# EAGLE board esp32VeroBoard_Stickout (EAGLE 9.6.2)
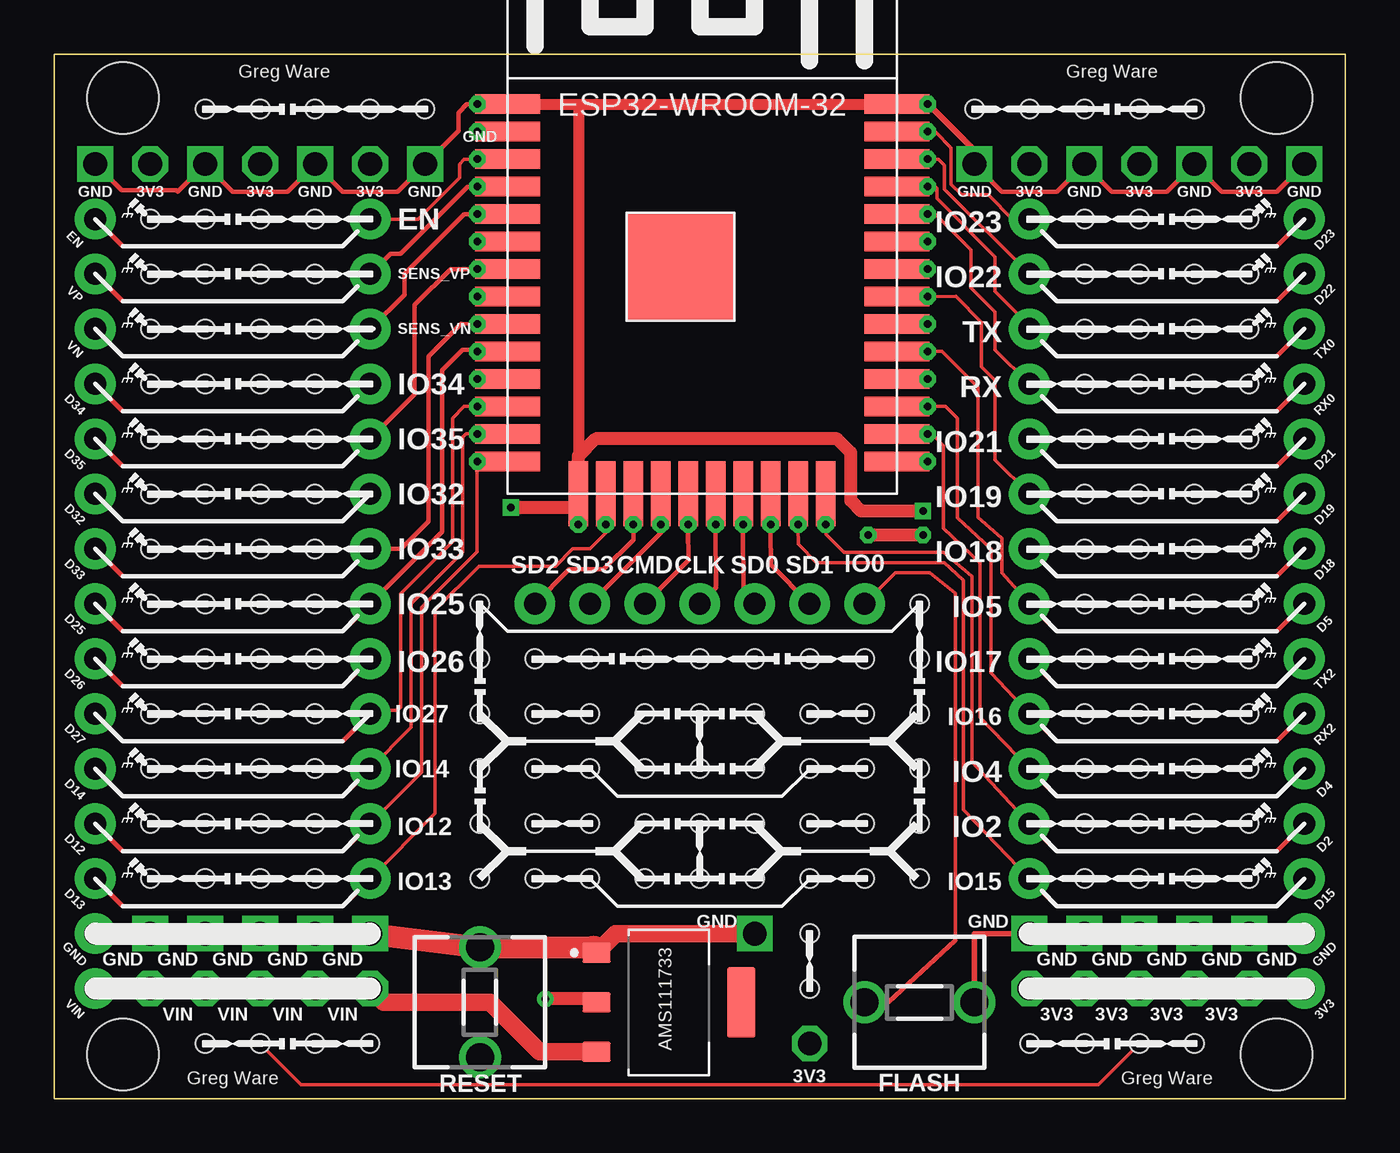
[diagram p0: board, top side]
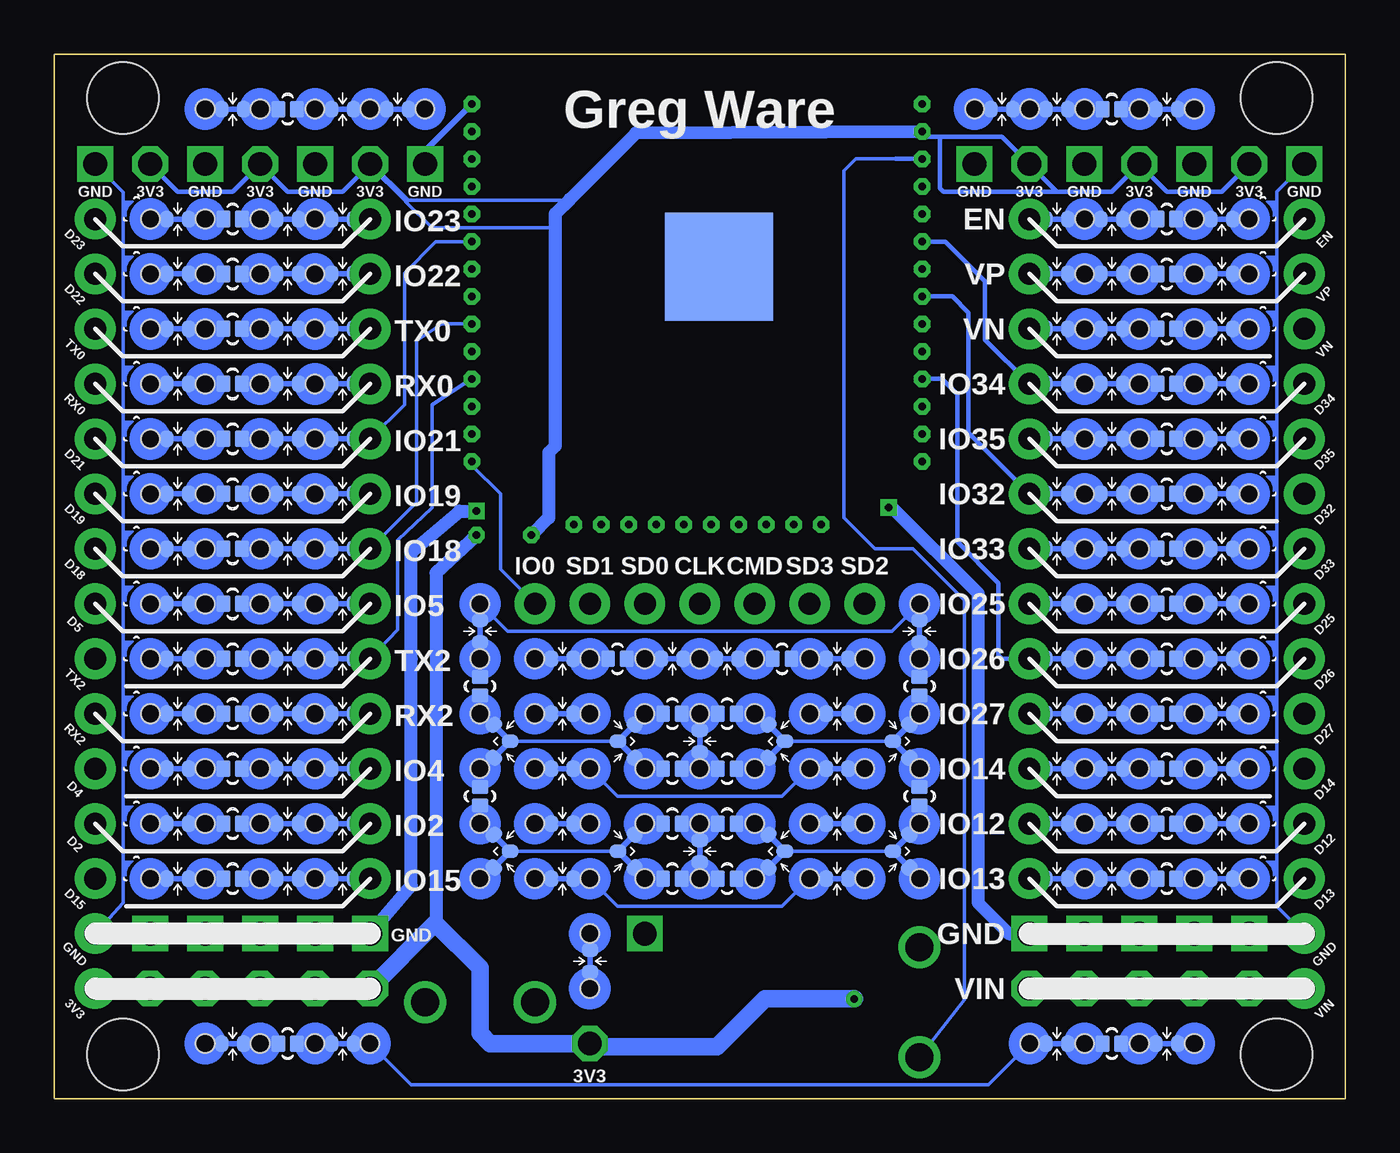
[diagram p1: board, bottom side, seen from below]

Size 59.69 x 48.26 mm. Coordinates in mm from the lower left corner, seen from the top.
Outline: 0,0 0,48.26 59.69,48.26 59.69,0 0,0
Copper layers (1*16): Top 0.035mm / dielectric 1.5mm / Bottom 0.035mm
Design rules "default": minimum track width 6mil, minimum drill 0.35mm, track to track 6mil, track to pad 6mil, pad to pad 6mil, via to via 6mil, smd to smd 6mil, copper to edge 40mil, drill to drill 6mil, minimum pad ring 10mil, minimum via ring 8mil, stop-mask expansion 4mil, vias tented up to drill 0mil, thermal gap 10mil
Net classes: 0 default: width 0.025 mm, clearance 0.025 mm
Holes 0.85 mm at 47.62,40.64 50.16,40.64 52.71,40.64 55.25,40.64 47.62,38.1 50.16,38.1 52.71,38.1 55.25,38.1 47.62,35.56 50.16,35.56 52.71,35.56 55.25,35.56 47.62,33.02 50.16,33.02 52.71,33.02 55.25,33.02 47.62,30.48 50.16,30.48 52.71,30.48 55.25,30.48 47.62,27.94 50.16,27.94 52.71,27.94 55.25,27.94 47.62,25.4 50.16,25.4 52.71,25.4 55.25,25.4 47.62,22.86 50.16,22.86 52.71,22.86 55.25,22.86 47.62,20.32 50.16,20.32 52.71,20.32 55.25,20.32 47.62,17.78 50.16,17.78 52.71,17.78 55.25,17.78 47.62,15.24 50.16,15.24 52.71,15.24 55.25,15.24 47.62,12.7 50.16,12.7 52.71,12.7 55.25,12.7 47.62,10.16 50.16,10.16 52.71,10.16 55.25,10.16 6.99,40.64 9.53,40.64 12.06,40.64 4.45,40.64 6.99,38.1 9.53,38.1 12.06,38.1 4.45,38.1 6.99,35.56 9.53,35.56 12.06,35.56 4.45,35.56 6.99,33.02 9.53,33.02 12.06,33.02 4.45,33.02 6.99,30.48 9.53,30.48 12.06,30.48 4.45,30.48 6.99,27.94 9.53,27.94 12.06,27.94 4.45,27.94 6.99,25.4 9.53,25.4 12.06,25.4 4.45,25.4 6.99,22.86 9.53,22.86 12.06,22.86 4.45,22.86 6.99,20.32 9.53,20.32 12.06,20.32 4.45,20.32 6.99,17.78 9.53,17.78 12.06,17.78 4.45,17.78 6.99,15.24 9.53,15.24 12.06,15.24 4.45,15.24 6.99,12.7 9.53,12.7 12.06,12.7 4.45,12.7 6.99,10.16 9.53,10.16 12.06,10.16 4.45,10.16 19.68,22.86 19.68,20.32 22.22,20.32 24.76,20.32 27.3,20.32 29.84,20.32 32.39,20.32 34.93,20.32 37.47,20.32 40.01,20.32 40.01,22.86 19.68,17.78 19.68,15.24 40.01,17.78 40.01,15.24 34.93,7.62 34.93,5.08 27.3,17.78 27.3,15.24 29.84,17.78 29.84,15.24 32.39,17.78 32.39,15.24 22.22,17.78 24.76,17.78 22.22,15.24 24.76,15.24 34.93,17.78 37.47,17.78 34.93,15.24 37.47,15.24 12.06,2.54 14.61,2.54 6.99,2.54 9.53,2.54 50.16,2.54 52.71,2.54 45.09,2.54 47.62,2.54 50.16,45.72 52.71,45.72 45.09,45.72 47.62,45.72 42.55,45.72 17.14,45.72 12.06,45.72 14.61,45.72 6.99,45.72 9.53,45.72 19.68,12.7 19.68,10.16 40.01,12.7 40.01,10.16 27.3,12.7 27.3,10.16 29.84,12.7 29.84,10.16 32.39,12.7 32.39,10.16 22.22,12.7 24.76,12.7 22.22,10.16 24.76,10.16 34.93,12.7 37.47,12.7 34.93,10.16 37.47,10.16

## Footprints (pad centres in the part's own frame; a part is rotated, then mirrored left to right if it is on the bottom)
SOT229P700X180-4N = smd 0.93 x 1.31: 1 -2.29,-3.345; 2 0,-3.345; 3 2.29,-3.345 | smd 3.24 x 1.31: 4 0,3.345
1X01_NO_SILK = drill 1.016 pad 1.88: 1 0,0
1X15_NO_SILK = drill 1.016 pad 1.88: 1 0,0; 2 2.54,0; 3 5.08,0; 4 7.62,0; 5 10.16,0; 6 12.7,0; 7 15.24,0; 8 17.78,0; 9 20.32,0; 10 22.86,0; 11 25.4,0; 12 27.94,0; 13 30.48,0; 14 33.02,0; 15 35.56,0
61300211121_VCC = drill 1.1 octagon: V+ 0,0
STAND-OFF = hole 3.302: 0,0
61300211121_GND = drill 1.1 square: GND 0,0
SMT-JUMPER_2_NO_NO-SILK_SMALL = smd 0.635 x 0.762: 1 -0.432,0; 2 0.432,0
SMT-JUMPER_TRI_NC_TRACE_NO-SILK_SMALL = smd 0.635 x 0.762 rotated 45 bottom: 1 -0.762,0 | smd 0.635 x 0.762 rotated 315 bottom: 2 0.762,0 | smd 0.635 x 0.762 bottom: 3 0,0.762
SMT-JUMPER_2_NC_TRACE_NO-SILK_SMALL = smd 0.635 x 0.762: 1 -0.508,0; 2 0.508,0
ESP32-WROOM = smd 3 x 0.9: 3V3 0,16.74; EN 0,15.47; GND1 0,18.01; GND3 18,18.01; IO0 18,1.5; IO4 18,2.77; IO5 18,6.58; IO12 0,1.5; IO14 0,2.77; IO16 18,4.04; IO17 18,5.31; IO18 18,7.85; IO19 18,9.12; IO21 18,11.66; IO22 18,15.47; IO23 18,16.74; IO25 0,6.58; IO26 0,5.31; IO27 0,4.04; IO32 0,9.12; IO33 0,7.85; IO34 0,11.66; IO35 0,10.39; NC 18,10.39; RX 18,12.93; SENSOR_VN 0,12.93; SENSOR_VP 0,14.2; TX 18,14.2 | smd 0.9 x 3: CLK 9.635,0; CMD 8.365,0; GND2 3.285,0; IO2 14.715,0; IO13 4.555,0; IO15 13.445,0; SD0 10.905,0; SD1 12.175,0; SD2 5.825,0; SD3 7.095,0 | smd 5 x 5: GND4 8,10.5 | smd 5 x 5 bottom: GND5 8,10.5
DTS-3_6MM = drill 1.3: 1 -2.54,0; 2 2.54,0

## Placement (x,y rotation side)
AMS111733  3.3V  [SOT229P700X180-4N]  28.42,4.45 270 top
CLK  [1X01_NO_SILK]  29.84,22.86 180 top
CMD  [1X01_NO_SILK]  27.3,22.86 180 top
E$1  [1X15_NO_SILK]  1.91,40.64 270 top
E$2  [61300211121_VCC]  34.93,2.54 0 top
E$3  [STAND-OFF]  3.17,2.03 0 top
E$4  [STAND-OFF]  56.52,2.03 0 top
E$5  [STAND-OFF]  56.52,46.23 0 top
E$6  [STAND-OFF]  3.17,46.23 0 top
E$7  [61300211121_GND]  32.39,7.62 0 top
E$8  [61300211121_GND]  42.55,43.18 0 top
E$9  [61300211121_GND]  1.91,43.18 0 top
E$10  [SMT-JUMPER_2_NO_NO-SILK_SMALL]  51.44,27.94 0 bottom
E$11  [SMT-JUMPER_2_NO_NO-SILK_SMALL]  51.44,30.48 0 bottom
E$12  [SMT-JUMPER_2_NO_NO-SILK_SMALL]  51.44,33.02 0 bottom
E$13  [SMT-JUMPER_2_NO_NO-SILK_SMALL]  51.44,35.56 0 bottom
E$14  [SMT-JUMPER_2_NO_NO-SILK_SMALL]  51.44,38.1 0 bottom
E$15  [SMT-JUMPER_2_NO_NO-SILK_SMALL]  51.44,40.64 0 bottom
E$16  [1X15_NO_SILK]  57.79,5.08 90 top
E$17  [SMT-JUMPER_2_NO_NO-SILK_SMALL]  51.44,25.4 0 bottom
E$18  [SMT-JUMPER_2_NO_NO-SILK_SMALL]  51.44,22.86 0 bottom
E$19  [SMT-JUMPER_2_NO_NO-SILK_SMALL]  51.44,20.32 0 bottom
E$20  [61300211121_GND]  57.79,43.18 0 top
E$21  [SMT-JUMPER_2_NO_NO-SILK_SMALL]  51.44,17.78 0 bottom
E$22  [61300211121_GND]  52.71,43.18 0 top
E$23  [61300211121_VCC]  55.25,43.18 0 top
E$24  [61300211121_GND]  4.45,7.62 0 top
E$25  [61300211121_GND]  6.99,7.62 0 top
E$26  [61300211121_GND]  9.53,7.62 0 top
E$27  [61300211121_GND]  12.06,7.62 0 top
E$28  [61300211121_GND]  14.61,7.62 0 top
E$29  [61300211121_GND]  55.25,7.62 0 top
E$30  [61300211121_GND]  52.71,7.62 0 top
E$31  [61300211121_GND]  50.16,7.62 0 top
E$32  [61300211121_GND]  47.62,7.62 0 top
E$33  [61300211121_GND]  45.09,7.62 0 top
E$34  [61300211121_VCC]  9.53,5.08 0 top
E$35  [61300211121_VCC]  12.06,5.08 0 top
E$36  [61300211121_VCC]  14.61,5.08 0 top
E$37  [61300211121_VCC]  6.99,5.08 0 top
E$38  [61300211121_VCC]  4.45,5.08 0 top
E$39  [61300211121_VCC]  45.09,5.08 0 top
E$40  [61300211121_VCC]  47.62,5.08 0 top
E$41  [61300211121_VCC]  50.16,5.08 0 top
E$42  [61300211121_VCC]  52.71,5.08 0 top
E$43  [61300211121_VCC]  55.25,5.08 0 top
E$44  [61300211121_VCC]  9.53,43.18 0 top
E$45  [61300211121_VCC]  4.45,43.18 0 top
E$46  [61300211121_VCC]  14.61,43.18 0 top
E$47  [SMT-JUMPER_2_NO_NO-SILK_SMALL]  51.44,15.24 0 bottom
E$48  [SMT-JUMPER_2_NO_NO-SILK_SMALL]  51.44,12.7 0 bottom
E$49  [61300211121_GND]  6.99,43.18 0 top
E$50  [61300211121_GND]  12.06,43.18 0 top
E$51  [61300211121_GND]  17.14,43.18 0 top
E$52  [SMT-JUMPER_2_NO_NO-SILK_SMALL]  51.44,10.16 0 bottom
E$53  [61300211121_GND]  47.62,43.18 0 top
E$54  [61300211121_VCC]  50.16,43.18 0 top
E$55  [SMT-JUMPER_2_NO_NO-SILK_SMALL]  33.66,20.32 0 bottom
E$56  [61300211121_VCC]  45.09,43.18 0 top
E$57  [SMT-JUMPER_TRI_NC_TRACE_NO-SILK_SMALL]  39.37,16.51 90 top
E$58  [SMT-JUMPER_2_NO_NO-SILK_SMALL]  8.26,40.64 0 bottom
E$59  [SMT-JUMPER_2_NO_NO-SILK_SMALL]  8.26,38.1 0 bottom
E$60  [SMT-JUMPER_2_NO_NO-SILK_SMALL]  8.26,35.56 0 bottom
E$61  [SMT-JUMPER_2_NO_NO-SILK_SMALL]  8.26,33.02 0 bottom
E$62  [SMT-JUMPER_2_NO_NO-SILK_SMALL]  8.26,30.48 0 bottom
E$63  [SMT-JUMPER_2_NO_NO-SILK_SMALL]  8.26,27.94 0 bottom
E$64  [SMT-JUMPER_2_NO_NO-SILK_SMALL]  8.26,25.4 0 bottom
E$65  [SMT-JUMPER_2_NO_NO-SILK_SMALL]  8.26,22.86 0 bottom
E$66  [SMT-JUMPER_2_NO_NO-SILK_SMALL]  8.26,20.32 0 bottom
E$67  [SMT-JUMPER_2_NO_NO-SILK_SMALL]  8.26,17.78 0 bottom
E$68  [SMT-JUMPER_2_NO_NO-SILK_SMALL]  8.26,15.24 0 bottom
E$69  [SMT-JUMPER_2_NO_NO-SILK_SMALL]  8.26,12.7 0 bottom
E$70  [SMT-JUMPER_2_NO_NO-SILK_SMALL]  8.26,10.16 0 bottom
E$71  [SMT-JUMPER_2_NC_TRACE_NO-SILK_SMALL]  53.98,40.64 0 bottom
E$72  [SMT-JUMPER_2_NC_TRACE_NO-SILK_SMALL]  53.98,38.1 0 bottom
E$73  [SMT-JUMPER_2_NC_TRACE_NO-SILK_SMALL]  53.98,35.56 0 bottom
E$74  [SMT-JUMPER_2_NC_TRACE_NO-SILK_SMALL]  53.98,33.02 0 bottom
E$75  [SMT-JUMPER_2_NC_TRACE_NO-SILK_SMALL]  53.98,30.48 0 bottom
E$76  [SMT-JUMPER_2_NC_TRACE_NO-SILK_SMALL]  53.98,27.94 0 bottom
E$77  [SMT-JUMPER_2_NC_TRACE_NO-SILK_SMALL]  53.98,25.4 0 bottom
E$78  [SMT-JUMPER_2_NC_TRACE_NO-SILK_SMALL]  53.98,22.86 0 bottom
E$79  [SMT-JUMPER_2_NC_TRACE_NO-SILK_SMALL]  53.98,20.32 0 bottom
E$80  [SMT-JUMPER_2_NC_TRACE_NO-SILK_SMALL]  53.98,17.78 0 bottom
E$81  [SMT-JUMPER_2_NC_TRACE_NO-SILK_SMALL]  53.98,15.24 0 bottom
E$82  [SMT-JUMPER_2_NC_TRACE_NO-SILK_SMALL]  53.98,12.7 0 bottom
E$83  [SMT-JUMPER_2_NC_TRACE_NO-SILK_SMALL]  53.98,10.16 0 bottom
E$84  [SMT-JUMPER_2_NC_TRACE_NO-SILK_SMALL]  36.2,20.32 0 bottom
E$85  [SMT-JUMPER_2_NC_TRACE_NO-SILK_SMALL]  36.2,17.78 0 bottom
E$86  [SMT-JUMPER_2_NC_TRACE_NO-SILK_SMALL]  36.2,15.24 0 bottom
E$87  [SMT-JUMPER_2_NC_TRACE_NO-SILK_SMALL]  36.2,12.7 0 bottom
E$88  [SMT-JUMPER_2_NC_TRACE_NO-SILK_SMALL]  36.2,10.16 0 bottom
E$89  [SMT-JUMPER_2_NC_TRACE_NO-SILK_SMALL]  31.11,20.32 0 bottom
E$90  [SMT-JUMPER_2_NC_TRACE_NO-SILK_SMALL]  28.57,20.32 0 bottom
E$91  [SMT-JUMPER_2_NC_TRACE_NO-SILK_SMALL]  23.49,20.32 0 bottom
E$92  [SMT-JUMPER_2_NC_TRACE_NO-SILK_SMALL]  23.49,17.78 0 bottom
E$93  [SMT-JUMPER_2_NC_TRACE_NO-SILK_SMALL]  23.49,15.24 0 bottom
E$94  [SMT-JUMPER_2_NC_TRACE_NO-SILK_SMALL]  23.49,12.7 0 bottom
E$95  [SMT-JUMPER_2_NC_TRACE_NO-SILK_SMALL]  23.49,10.16 0 bottom
E$96  [SMT-JUMPER_2_NC_TRACE_NO-SILK_SMALL]  51.44,2.54 0 bottom
E$97  [SMT-JUMPER_2_NC_TRACE_NO-SILK_SMALL]  46.36,2.54 0 bottom
E$98  [SMT-JUMPER_2_NC_TRACE_NO-SILK_SMALL]  13.34,2.54 0 bottom
E$99  [SMT-JUMPER_2_NC_TRACE_NO-SILK_SMALL]  8.26,2.54 0 bottom
E$100  [SMT-JUMPER_2_NC_TRACE_NO-SILK_SMALL]  5.71,10.16 0 bottom
E$101  [SMT-JUMPER_2_NC_TRACE_NO-SILK_SMALL]  5.71,12.7 0 bottom
E$102  [SMT-JUMPER_2_NC_TRACE_NO-SILK_SMALL]  5.71,15.24 0 bottom
E$103  [SMT-JUMPER_2_NC_TRACE_NO-SILK_SMALL]  5.71,17.78 0 bottom
E$104  [SMT-JUMPER_2_NC_TRACE_NO-SILK_SMALL]  5.71,20.32 0 bottom
E$105  [SMT-JUMPER_2_NC_TRACE_NO-SILK_SMALL]  5.71,22.86 0 bottom
E$106  [SMT-JUMPER_2_NC_TRACE_NO-SILK_SMALL]  5.71,25.4 0 bottom
E$107  [SMT-JUMPER_2_NC_TRACE_NO-SILK_SMALL]  5.71,27.94 0 bottom
E$108  [SMT-JUMPER_2_NC_TRACE_NO-SILK_SMALL]  5.71,30.48 0 bottom
E$109  [SMT-JUMPER_2_NC_TRACE_NO-SILK_SMALL]  5.71,33.02 0 bottom
E$110  [SMT-JUMPER_2_NC_TRACE_NO-SILK_SMALL]  5.71,35.56 0 bottom
E$111  [SMT-JUMPER_2_NC_TRACE_NO-SILK_SMALL]  5.71,38.1 0 bottom
E$112  [SMT-JUMPER_2_NC_TRACE_NO-SILK_SMALL]  5.71,40.64 0 bottom
E$113  [SMT-JUMPER_2_NC_TRACE_NO-SILK_SMALL]  8.26,45.72 0 bottom
E$114  [SMT-JUMPER_2_NC_TRACE_NO-SILK_SMALL]  13.34,45.72 0 bottom
E$115  [SMT-JUMPER_2_NC_TRACE_NO-SILK_SMALL]  15.88,45.72 0 bottom
E$116  [SMT-JUMPER_2_NC_TRACE_NO-SILK_SMALL]  43.82,45.72 0 bottom
E$117  [SMT-JUMPER_2_NC_TRACE_NO-SILK_SMALL]  46.36,45.72 0 bottom
E$118  [SMT-JUMPER_2_NC_TRACE_NO-SILK_SMALL]  51.44,45.72 0 bottom
E$119  [SMT-JUMPER_2_NO_NO-SILK_SMALL]  48.9,45.72 0 bottom
E$120  [SMT-JUMPER_2_NO_NO-SILK_SMALL]  10.79,45.72 0 bottom
E$121  [SMT-JUMPER_2_NO_NO-SILK_SMALL]  48.9,2.54 0 bottom
E$122  [SMT-JUMPER_2_NO_NO-SILK_SMALL]  10.79,2.54 0 bottom
E$123  [SMT-JUMPER_2_NC_TRACE_NO-SILK_SMALL]  40.01,21.59 90 bottom
E$124  [SMT-JUMPER_TRI_NC_TRACE_NO-SILK_SMALL]  39.37,11.43 90 top
E$125  [SMT-JUMPER_TRI_NC_TRACE_NO-SILK_SMALL]  26.67,16.51 90 top
E$126  [SMT-JUMPER_TRI_NC_TRACE_NO-SILK_SMALL]  26.67,11.43 90 top
E$127  [SMT-JUMPER_TRI_NC_TRACE_NO-SILK_SMALL]  20.16,11.43 270 top
E$128  [SMT-JUMPER_2_NC_TRACE_NO-SILK_SMALL]  29.84,16.51 90 bottom
E$129  [SMT-JUMPER_2_NC_TRACE_NO-SILK_SMALL]  29.84,11.43 90 bottom
E$130  [SMT-JUMPER_TRI_NC_TRACE_NO-SILK_SMALL]  20.16,16.51 270 top
E$131  [SMT-JUMPER_TRI_NC_TRACE_NO-SILK_SMALL]  32.86,16.51 270 top
E$132  [SMT-JUMPER_2_NC_TRACE_NO-SILK_SMALL]  19.68,21.59 90 bottom
E$133  [SMT-JUMPER_TRI_NC_TRACE_NO-SILK_SMALL]  32.86,11.43 270 top
E$134  [SMT-JUMPER_2_NO_NO-SILK_SMALL]  26.04,20.32 0 bottom
E$135  [SMT-JUMPER_2_NO_NO-SILK_SMALL]  19.68,19.05 270 bottom
E$136  [SMT-JUMPER_2_NO_NO-SILK_SMALL]  19.68,13.97 270 bottom
E$137  [SMT-JUMPER_2_NO_NO-SILK_SMALL]  40.01,19.05 270 bottom
E$138  [SMT-JUMPER_2_NO_NO-SILK_SMALL]  40.01,13.97 270 bottom
E$139  [SMT-JUMPER_2_NO_NO-SILK_SMALL]  31.11,17.78 0 bottom
E$140  [SMT-JUMPER_2_NO_NO-SILK_SMALL]  28.57,17.78 0 bottom
E$141  [SMT-JUMPER_2_NC_TRACE_NO-SILK_SMALL]  48.9,10.16 0 bottom
E$142  [SMT-JUMPER_2_NC_TRACE_NO-SILK_SMALL]  48.9,12.7 0 bottom
E$143  [SMT-JUMPER_2_NC_TRACE_NO-SILK_SMALL]  48.9,15.24 0 bottom
E$144  [SMT-JUMPER_2_NC_TRACE_NO-SILK_SMALL]  48.9,17.78 0 bottom
E$145  [SMT-JUMPER_2_NC_TRACE_NO-SILK_SMALL]  48.9,20.32 0 bottom
E$146  [SMT-JUMPER_2_NC_TRACE_NO-SILK_SMALL]  48.9,22.86 0 bottom
E$147  [SMT-JUMPER_2_NC_TRACE_NO-SILK_SMALL]  48.9,25.4 0 bottom
E$148  [SMT-JUMPER_2_NC_TRACE_NO-SILK_SMALL]  48.9,27.94 0 bottom
E$149  [SMT-JUMPER_2_NC_TRACE_NO-SILK_SMALL]  48.9,30.48 0 bottom
E$150  [SMT-JUMPER_2_NC_TRACE_NO-SILK_SMALL]  48.9,33.02 0 bottom
E$151  [SMT-JUMPER_2_NC_TRACE_NO-SILK_SMALL]  48.9,35.56 0 bottom
E$152  [SMT-JUMPER_2_NC_TRACE_NO-SILK_SMALL]  48.9,38.1 0 bottom
E$153  [SMT-JUMPER_2_NC_TRACE_NO-SILK_SMALL]  48.9,40.64 0 bottom
E$154  [SMT-JUMPER_2_NC_TRACE_NO-SILK_SMALL]  10.79,10.16 0 bottom
E$155  [SMT-JUMPER_2_NC_TRACE_NO-SILK_SMALL]  10.79,12.7 0 bottom
E$156  [SMT-JUMPER_2_NC_TRACE_NO-SILK_SMALL]  10.79,15.24 0 bottom
E$157  [SMT-JUMPER_2_NC_TRACE_NO-SILK_SMALL]  10.79,17.78 0 bottom
E$158  [SMT-JUMPER_2_NC_TRACE_NO-SILK_SMALL]  10.79,20.32 0 bottom
E$159  [SMT-JUMPER_2_NC_TRACE_NO-SILK_SMALL]  10.79,22.86 0 bottom
E$160  [SMT-JUMPER_2_NC_TRACE_NO-SILK_SMALL]  10.79,25.4 0 bottom
E$161  [SMT-JUMPER_2_NC_TRACE_NO-SILK_SMALL]  10.79,27.94 0 bottom
E$162  [SMT-JUMPER_2_NC_TRACE_NO-SILK_SMALL]  10.79,30.48 0 bottom
E$163  [SMT-JUMPER_2_NC_TRACE_NO-SILK_SMALL]  10.79,33.02 0 bottom
E$164  [SMT-JUMPER_2_NC_TRACE_NO-SILK_SMALL]  10.79,35.56 0 bottom
E$165  [SMT-JUMPER_2_NC_TRACE_NO-SILK_SMALL]  10.79,38.1 0 bottom
E$166  [SMT-JUMPER_2_NC_TRACE_NO-SILK_SMALL]  10.79,40.64 0 bottom
E$167  [SMT-JUMPER_2_NO_NO-SILK_SMALL]  31.11,15.24 0 bottom
E$168  [SMT-JUMPER_2_NO_NO-SILK_SMALL]  28.57,15.24 0 bottom
E$169  [SMT-JUMPER_2_NO_NO-SILK_SMALL]  28.57,12.7 0 bottom
E$170  [SMT-JUMPER_2_NO_NO-SILK_SMALL]  31.11,12.7 0 bottom
E$171  [SMT-JUMPER_2_NO_NO-SILK_SMALL]  31.11,10.16 0 bottom
E$172  [SMT-JUMPER_2_NO_NO-SILK_SMALL]  28.57,10.16 0 bottom
E$173  [SMT-JUMPER_2_NC_TRACE_NO-SILK_SMALL]  46.36,22.86 0 bottom
E$174  [SMT-JUMPER_2_NC_TRACE_NO-SILK_SMALL]  46.36,25.4 0 bottom
E$175  [SMT-JUMPER_2_NC_TRACE_NO-SILK_SMALL]  46.36,27.94 0 bottom
E$176  [SMT-JUMPER_2_NC_TRACE_NO-SILK_SMALL]  46.36,30.48 0 bottom
E$177  [SMT-JUMPER_2_NC_TRACE_NO-SILK_SMALL]  46.36,33.02 0 bottom
E$178  [SMT-JUMPER_2_NC_TRACE_NO-SILK_SMALL]  46.36,35.56 0 bottom
E$179  [SMT-JUMPER_2_NC_TRACE_NO-SILK_SMALL]  46.36,38.1 0 bottom
E$180  [SMT-JUMPER_2_NC_TRACE_NO-SILK_SMALL]  46.36,40.64 0 bottom
E$181  [SMT-JUMPER_2_NC_TRACE_NO-SILK_SMALL]  46.36,10.16 0 bottom
E$182  [SMT-JUMPER_2_NC_TRACE_NO-SILK_SMALL]  46.36,12.7 0 bottom
E$183  [SMT-JUMPER_2_NC_TRACE_NO-SILK_SMALL]  46.36,15.24 0 bottom
E$184  [SMT-JUMPER_2_NC_TRACE_NO-SILK_SMALL]  46.36,17.78 0 bottom
E$185  [SMT-JUMPER_2_NC_TRACE_NO-SILK_SMALL]  46.36,20.32 0 bottom
E$186  [SMT-JUMPER_2_NC_TRACE_NO-SILK_SMALL]  13.34,10.16 0 bottom
E$187  [SMT-JUMPER_2_NC_TRACE_NO-SILK_SMALL]  13.34,12.7 0 bottom
E$188  [SMT-JUMPER_2_NC_TRACE_NO-SILK_SMALL]  13.34,15.24 0 bottom
E$189  [SMT-JUMPER_2_NC_TRACE_NO-SILK_SMALL]  13.34,17.78 0 bottom
E$190  [SMT-JUMPER_2_NC_TRACE_NO-SILK_SMALL]  13.34,20.32 0 bottom
E$191  [SMT-JUMPER_2_NC_TRACE_NO-SILK_SMALL]  13.34,22.86 0 bottom
E$192  [SMT-JUMPER_2_NC_TRACE_NO-SILK_SMALL]  13.34,25.4 0 bottom
E$193  [SMT-JUMPER_2_NC_TRACE_NO-SILK_SMALL]  13.34,27.94 0 bottom
E$194  [SMT-JUMPER_2_NC_TRACE_NO-SILK_SMALL]  13.34,30.48 0 bottom
E$195  [SMT-JUMPER_2_NC_TRACE_NO-SILK_SMALL]  13.34,33.02 0 bottom
E$196  [SMT-JUMPER_2_NC_TRACE_NO-SILK_SMALL]  13.34,35.56 0 bottom
E$197  [SMT-JUMPER_2_NC_TRACE_NO-SILK_SMALL]  13.34,38.1 0 bottom
E$198  [SMT-JUMPER_2_NC_TRACE_NO-SILK_SMALL]  13.34,40.64 0 bottom
E$199  [SMT-JUMPER_2_NC_TRACE_NO-SILK_SMALL]  34.93,6.35 90 bottom
E$200  [SMT-JUMPER_1_NC_CIRCLE_GND_NO-SILK_SMALL]  4.45,40.64 0 top
E$201  [SMT-JUMPER_1_NC_CIRCLE_GND_NO-SILK_SMALL]  4.45,38.1 0 top
E$202  [SMT-JUMPER_1_NC_CIRCLE_GND_NO-SILK_SMALL]  4.45,35.56 0 top
E$203  [SMT-JUMPER_1_NC_CIRCLE_GND_NO-SILK_SMALL]  4.45,33.02 0 top
E$204  [SMT-JUMPER_1_NC_CIRCLE_GND_NO-SILK_SMALL]  4.45,30.48 0 top
E$205  [SMT-JUMPER_1_NC_CIRCLE_GND_NO-SILK_SMALL]  4.45,27.94 0 top
E$206  [SMT-JUMPER_1_NC_CIRCLE_GND_NO-SILK_SMALL]  4.45,25.4 0 top
E$207  [SMT-JUMPER_1_NC_CIRCLE_GND_NO-SILK_SMALL]  4.45,22.86 0 top
E$208  [SMT-JUMPER_1_NC_CIRCLE_GND_NO-SILK_SMALL]  4.45,20.32 0 top
E$209  [SMT-JUMPER_1_NC_CIRCLE_GND_NO-SILK_SMALL]  4.45,17.78 0 top
E$210  [SMT-JUMPER_1_NC_CIRCLE_GND_NO-SILK_SMALL]  4.45,15.24 0 top
E$211  [SMT-JUMPER_1_NC_CIRCLE_GND_NO-SILK_SMALL]  4.45,12.7 0 top
E$212  [SMT-JUMPER_1_NC_CIRCLE_GND_NO-SILK_SMALL]  4.45,10.16 0 top
E$213  [SMT-JUMPER_1_NC_CIRCLE_GND_NO-SILK_SMALL_RIGT]  55.25,40.64 0 top
E$214  [SMT-JUMPER_1_NC_CIRCLE_GND_NO-SILK_SMALL_RIGT]  55.25,38.1 0 top
E$215  [SMT-JUMPER_1_NC_CIRCLE_GND_NO-SILK_SMALL_RIGT]  55.25,35.56 0 top
E$216  [SMT-JUMPER_1_NC_CIRCLE_GND_NO-SILK_SMALL_RIGT]  55.25,33.02 0 top
E$217  [SMT-JUMPER_1_NC_CIRCLE_GND_NO-SILK_SMALL_RIGT]  55.25,30.48 0 top
E$218  [SMT-JUMPER_1_NC_CIRCLE_GND_NO-SILK_SMALL_RIGT]  55.25,27.94 0 top
E$219  [SMT-JUMPER_1_NC_CIRCLE_GND_NO-SILK_SMALL_RIGT]  55.25,25.4 0 top
E$220  [SMT-JUMPER_1_NC_CIRCLE_GND_NO-SILK_SMALL_RIGT]  55.25,22.86 0 top
E$221  [SMT-JUMPER_1_NC_CIRCLE_GND_NO-SILK_SMALL_RIGT]  55.25,20.32 0 top
E$222  [SMT-JUMPER_1_NC_CIRCLE_GND_NO-SILK_SMALL_RIGT]  55.25,17.78 0 top
E$223  [SMT-JUMPER_1_NC_CIRCLE_GND_NO-SILK_SMALL_RIGT]  55.25,15.24 0 top
E$224  [SMT-JUMPER_1_NC_CIRCLE_GND_NO-SILK_SMALL_RIGT]  55.25,12.7 0 top
E$225  [SMT-JUMPER_1_NC_CIRCLE_GND_NO-SILK_SMALL_RIGT]  55.25,10.16 0 top
EN  [1X01_NO_SILK]  14.61,40.64 0 top
ESPWROOM  [ESP32-WROOM]  20.95,27.94 0 top
FLASH  [DTS-3_6MM]  40.01,4.45 180 top
IO0  [1X01_NO_SILK]  37.47,22.86 0 top
IO2  [1X01_NO_SILK]  45.09,12.7 0 top
IO4  [1X01_NO_SILK]  45.09,15.24 0 top
IO5  [1X01_NO_SILK]  45.09,22.86 0 top
IO12  [1X01_NO_SILK]  14.61,12.7 0 top
IO13  [1X01_NO_SILK]  14.61,10.16 0 top
IO14  [1X01_NO_SILK]  14.61,15.24 0 top
IO15  [1X01_NO_SILK]  45.09,10.16 0 top
IO16  [1X01_NO_SILK]  45.09,17.78 0 top
IO17  [1X01_NO_SILK]  45.09,20.32 0 top
IO18  [1X01_NO_SILK]  45.09,25.4 0 top
IO19  [1X01_NO_SILK]  45.09,27.94 0 top
IO21  [1X01_NO_SILK]  45.09,30.48 0 top
IO22  [1X01_NO_SILK]  45.09,38.1 0 top
IO23  [1X01_NO_SILK]  45.09,40.64 0 top
IO25  [1X01_NO_SILK]  14.61,22.86 0 top
IO26  [1X01_NO_SILK]  14.61,20.32 0 top
IO27  [1X01_NO_SILK]  14.61,17.78 0 top
IO32  [1X01_NO_SILK]  14.61,27.94 0 top
IO33  [1X01_NO_SILK]  14.61,25.4 0 top
IO34  [1X01_NO_SILK]  14.61,33.02 0 top
IO35  [1X01_NO_SILK]  14.61,30.48 0 top
RESET  [DTS-3_6MM]  19.68,4.45 90 top
RX  [1X01_NO_SILK]  45.09,33.02 0 top
SD0  [1X01_NO_SILK]  32.39,22.86 180 top
SD1  [1X01_NO_SILK]  34.93,22.86 180 top
SD2  [1X01_NO_SILK]  22.22,22.86 180 top
SD3  [1X01_NO_SILK]  24.76,22.86 180 top
SENS_VN  [1X01_NO_SILK]  14.61,35.56 0 top
SENS_VP  [1X01_NO_SILK]  14.61,38.1 0 top
TX  [1X01_NO_SILK]  45.09,35.56 0 top

## Library data of the parts
AMS111733 = AMS1117-5.0
CLK CMD EN IO0 IO2 IO4 IO5 IO12-IO19 IO21-IO23 IO25-IO27 IO32-IO35 RX SD0 SD1-SD3 SENS_VN SENS_VP TX = SparkFun-Connectors
E$1 E$16 = SparkFun-Connectors_PhG
E$2 E$7-E$9 E$20 E$22-E$46 E$49-E$51 E$53 E$54 E$56 = Headers_PhG
E$3-E$6 = SparkFun-Hardware
E$10-E$15 E$17-E$19 E$21 E$47 E$48 E$52 E$55 E$57-E$225 = SparkFun-Jumpers_PhG
ESPWROOM = ESP32
FLASH RESET = switch-tact

## Nets
3V3: AMS111733.2 E$2.V+ E$16.1 E$23.V+ E$39.V+ E$40.V+ E$41.V+ E$42.V+ E$43.V+ E$44.V+ E$45.V+ E$46.V+ E$54.V+ E$56.V+ ESPWROOM.3V3
CLK: CLK.1 ESPWROOM.CLK
CMD: CMD.1 ESPWROOM.CMD
EN: E$1.1 EN.1 ESPWROOM.EN RESET.1
GND: AMS111733.1 E$1.14 E$7.GND E$8.GND E$9.GND E$16.2 E$20.GND E$22.GND E$24.GND E$25.GND E$26.GND E$27.GND E$28.GND E$29.GND E$30.GND E$31.GND E$32.GND E$33.GND E$49.GND E$50.GND E$51.GND E$53.GND ESPWROOM.GND1 ESPWROOM.GND2 ESPWROOM.GND3 FLASH.1 RESET.2
IO0: ESPWROOM.IO0 FLASH.2 IO0.1
IO2: E$16.4 ESPWROOM.IO2 IO2.1
IO4: E$16.5 ESPWROOM.IO4 IO4.1
IO5: E$16.8 ESPWROOM.IO5 IO5.1
IO12: E$1.12 ESPWROOM.IO12 IO12.1
IO13: E$1.13 ESPWROOM.IO13 IO13.1
IO14: E$1.11 ESPWROOM.IO14 IO14.1
IO15: E$16.3 ESPWROOM.IO15 IO15.1
IO16: E$16.6 ESPWROOM.IO16 IO16.1
IO17: E$16.7 ESPWROOM.IO17 IO17.1
IO18: E$16.9 ESPWROOM.IO18 IO18.1
IO19: E$16.10 ESPWROOM.IO19 IO19.1
IO21: E$16.11 ESPWROOM.IO21 IO21.1
IO22: E$16.14 ESPWROOM.IO22 IO22.1
IO23: E$16.15 ESPWROOM.IO23 IO23.1
IO25: E$1.8 ESPWROOM.IO25 IO25.1
IO26: E$1.9 ESPWROOM.IO26 IO26.1
IO27: E$1.10 ESPWROOM.IO27 IO27.1
IO32: E$1.6 ESPWROOM.IO32 IO32.1
IO33: E$1.7 ESPWROOM.IO33 IO33.1
IO34: E$1.4 ESPWROOM.IO34 IO34.1
IO35: E$1.5 ESPWROOM.IO35 IO35.1
RX: E$16.12 ESPWROOM.RX RX.1
SD0: ESPWROOM.SD0 SD0.1
SD1: ESPWROOM.SD1 SD1.1
SD2: ESPWROOM.SD2 SD2.1
SD3: ESPWROOM.SD3 SD3.1
SENSOR_VN: E$1.3 ESPWROOM.SENSOR_VN SENS_VN.1
SENSOR_VP: E$1.2 ESPWROOM.SENSOR_VP SENS_VP.1
TX: E$16.13 ESPWROOM.TX TX.1
VIN: AMS111733.3 E$1.15 E$34.V+ E$35.V+ E$36.V+ E$37.V+ E$38.V+

## Tracks (layer width: path | path; a pad name or v marks a point on that pad's centre or on a via)
3V3  (via drill 0.35)
  Top 0.152: ESPWROOM.3V3 19.76,44.68 v19.56,44.68
  Top 0.61: v40.16,26.04 v37.62,26.04 | AMS111733.2 25.23,4.6 v22.7,4.6
  Top 0.813: E$16.1 E$43.V+ E$42.V+ E$41.V+ E$40.V+ E$39.V+
  Bottom 0.152: 36.51,40.23 42.23,40.23 43.44,41.44 43.44,41.5 43.4,41.5 35.88,41.5 35.85,41.56
  Bottom 0.203: 13.34,41.91 E$46.V+ 15.88,44.45 18.73,44.45 | 13.34,41.91 10.79,41.91 E$44.V+ 8.26,41.91 5.71,41.91 E$45.V+ | E$23.V+ 53.98,41.91 51.44,41.91 E$54.V+ 48.9,41.91 46.36,41.91 E$56.V+ | v19.56,44.68 19.53,44.45 18.73,44.45 | 13.34,41.91 18.57,41.91 18.73,42.07 18.73,44.45 | 42.04,8.13 42.07,8.1
  Bottom 0.305: 43.4,41.5 E$56.V+
  Bottom 0.61: v37.62,26.04 36.83,26.83 36.83,29.84 36.51,30.16 36.51,40.23 36.51,40.9 35.85,41.56 32.8,44.61 v19.56,44.68 | v40.16,26.04 42.04,24.29 42.04,8.13
  Bottom 0.813: v22.7,4.6 26.83,4.6 29.05,2.38 34.77,2.38 E$2.V+ 39.53,2.54 40.01,3.02 40.01,6.03 42.07,8.1 E$39.V+
CLK  (via drill 0.35)
  Top 0.152: ESPWROOM.CLK v30.59,26.52 v30.58,26.51
  Top 0.203: CLK.1 30.59,23.61 v30.58,26.51 v30.58,26.52
CMD  (via drill 0.35)
  Top 0.152: ESPWROOM.CMD 29.32,26.36 29.31,26.35
  Top 0.203: CMD.1 29.32,24.88 29.31,26.35 v29.31,26.52
EN  (via drill 0.35)
  Top 0.152: 14.68,40.71 EN.1 16.83,40.64 18.73,42.55 18.73,43.18 18.96,43.41 19.61,43.41 | ESPWROOM.EN 19.61,43.41 | v19.56,43.41 19.61,43.41
  Top 0.203: EN.1 13.34,39.37 3.17,39.37 E$1.1
  Bottom 0.152: RESET.1 17.62,4.56 17.62,23.02 20,25.4 21.75,25.4 23.18,26.83 23.18,42.86 22.62,43.42 20.8,43.42
  Bottom 0.203: 20.8,43.42 19.61,43.42 v19.56,43.41
GND  (via drill 0.35)
  Top 0.152: ESPWROOM.GND2 v24.24,26.53 v24.23,26.52
  Top 0.203: E$20.GND 56.52,41.91 53.98,41.91 E$22.GND 51.44,41.91 48.9,41.91 E$53.GND 46.36,41.91 43.82,41.91 E$8.GND | ESPWROOM.GND1 19.93,45.95 v19.56,45.95 19.07,45.95 18.69,45.56 18.69,44.72 E$51.GND 15.88,41.91 13.34,41.91 E$50.GND 10.79,41.91 8.26,41.91 E$49.GND 5.71,41.91 5.66,41.97 3.12,41.97 E$9.GND
  Top 0.254: FLASH.1 42.55,7.62 E$33.GND | E$8.GND 42.55,43.81 40.41,45.95 39.06,45.95 | ESPWROOM.GND1 19.76,45.95
  Top 0.406: 39.06,45.95 ESPWROOM.GND3
  Top 0.508: ESPWROOM.GND1 24.45,45.95 | 24.45,45.95 v40.39,45.95 ESPWROOM.GND3 | v24.23,26.52 24.24,45.74 24.45,45.95
  Top 0.61: E$1.14 E$24.GND E$25.GND E$26.GND | v21.11,27.3 24.24,27.3 v24.23,26.52 24.24,29.69 25.03,30.48 36.2,30.48 36.83,29.84 36.83,27.62 37.31,27.15 v40.16,27.15
  Top 0.813: E$16.2 E$29.GND E$30.GND E$31.GND E$32.GND E$33.GND | E$28.GND 14.76,7.78 | 24.99,7 AMS111733.1 25.96,7.62 E$7.GND
  Top 1.016: E$26.GND E$27.GND E$28.GND RESET.2 24.83,6.99 24.99,7
  Bottom 0.152: E$20.GND 56.49,41.88 56.49,9.04 E$16.2 | E$9.GND 3.17,41.91 3.17,8.89 E$1.14
  Bottom 0.203: E$8.GND 42.55,43.79
  Bottom 0.254: v21.11,27.3 21.11,27.15 | 15.24,7.62 E$28.GND | 42.55,43.79 v40.39,45.95
  Bottom 0.61: E$33.GND 43.18,9.84 43.18,20.32 43.18,25.24 40.96,27.15 v40.16,27.15 | v21.11,27.3 20.95,27.3 16.99,23.34 16.99,9.05 15.56,7.62 E$28.GND
IO0  (via drill 0.35)
  Top 0.152: IO0.1 38.89,24.29 40.48,24.29 41.66,23.34 41.66,7.3 | ESPWROOM.IO0 v40.39,29.44
  Top 0.203: 41.66,7.3 38.58,4.45 FLASH.2
  Bottom 0.152: IO0.1 39.05,24.45 39.05,27.94 40.39,29.27 v40.39,29.44
IO2  (via drill 0.35)
  Top 0.152: v35.66,26.51 35.67,26.08 36.51,25.24 41.12,25.24 42.42,24.13 42.42,15.56 IO2.1 | v35.66,26.51 v35.66,26.52 | ESPWROOM.IO2 v35.67,26.52 v35.66,26.51
  Top 0.203: IO2.1 46.36,11.43 56.52,11.43 E$16.4
IO4  (via drill 0.35)
  Top 0.152: IO4.1 42.8,17.62 42.8,24.77 41.12,26.35 41.12,30.16 40.57,30.71 v40.39,30.71 ESPWROOM.IO4
  Top 0.203: IO4.1 46.36,13.97 56.52,13.97 E$16.5
IO5  (via drill 0.35)
  Top 0.152: IO5.1 43.82,24.29 43.82,25.9 42.7,26.85 42.7,32.86 41.05,34.52 v40.39,34.52
  Top 0.203: IO5.1 46.36,21.59 56.52,21.59 E$16.8 | ESPWROOM.IO5 v40.39,34.52
IO12  (via drill 0.35)
  Top 0.152: IO12.1 16.99,15.08 16.99,22.7 19.56,25.27 v19.56,29.44 ESPWROOM.IO12
  Top 0.203: IO12.1 13.34,11.43 3.17,11.43 E$1.12
IO13  (via drill 0.35)
  Top 0.152: IO13.1 17.62,13.18 17.62,22.59 19.64,24.61 23.18,24.61 23.97,25.4 24.76,25.4 25.5,26.14 25.5,26.19 | 25.5,26.19 v25.5,26.52 | ESPWROOM.IO13 25.51,26.2 25.5,26.19
  Top 0.203: 14.61,10.95 IO13.1 13.34,8.89 3.17,8.89 E$1.13
IO14  (via drill 0.35)
  Top 0.152: IO14.1 16.51,17.14 16.51,22.86 18.89,25.24 18.89,30.55 19.05,30.71 v19.56,30.71 ESPWROOM.IO14
  Top 0.203: IO14.1 13.34,13.97 3.17,13.97 E$1.11
IO15  (via drill 0.35)
  Top 0.152: 34.39,26.35 34.4,25.61 35.24,24.77 41.15,24.77 42.04,23.96 42.04,13.34 IO15.1 | 34.39,26.35 v34.39,26.52 | ESPWROOM.IO15 34.4,26.36 34.39,26.35
  Top 0.203: IO15.1 46.36,8.89 56.52,8.89 E$16.3
IO16  (via drill 0.35)
  Top 0.152: IO16.1 43.31,19.68 43.31,25.4 41.75,26.83 41.75,31.43 41.2,31.98 v40.39,31.98 ESPWROOM.IO16
  Top 0.203: IO16.1 46.36,16.51 56.52,16.51 E$16.6
  Top 0.254: 39.46,31.98 v40.39,31.98
IO17  (via drill 0.35)
  Top 0.203: IO17.1 46.36,19.05 56.52,19.05 E$16.7 | ESPWROOM.IO17 v40.39,33.25
  Bottom 0.152: v40.39,33.25 42.23,32.06 42.23,27.3 43.82,25.8 43.82,21.67 IO17.1
IO18  (via drill 0.35)
  Top 0.203: IO18.1 46.36,24.13 56.52,24.13 E$16.9 | ESPWROOM.IO18 v40.39,35.79
  Bottom 0.152: IO18.1 42.94,27.54 42.94,35 41.75,35.79 v40.39,35.79
IO19  (via drill 0.35)
  Top 0.152: IO19.1 43.5,29.53 43.5,33.18 42.86,33.81 42.86,35.88 41.68,37.06 v40.39,37.06 ESPWROOM.IO19
  Top 0.203: IO19.1 46.36,26.67 56.52,26.67 E$16.10
IO21  (via drill 0.35)
  Top 0.152: ESPWROOM.IO21 39.46,39.6 | ESPWROOM.IO21 | ESPWROOM.IO21 v40.39,39.6
  Top 0.203: IO21.1 46.36,29.21 56.52,29.21 E$16.11
  Bottom 0.152: IO21.1 43.5,32.07 43.5,38.15 42.04,39.6 v40.39,39.6
IO22  (via drill 0.35)
  Top 0.152: IO22.1 41.16,42.02 41.16,43.13 40.89,43.41 v40.39,43.41 ESPWROOM.IO22
  Top 0.203: IO22.1 46.36,36.83 56.52,36.83 E$16.14
IO23  (via drill 0.35)
  Top 0.152: 44.29,40.64 43.18,41.75 41.97,41.75 41.47,42.25 41.47,43.94 40.73,44.68 v40.39,44.68 ESPWROOM.IO23
  Top 0.203: 44.29,40.64 IO23.1 46.36,39.37 56.52,39.37 E$16.15
IO25  (via drill 0.35)
  Top 0.152: 20.87,34.61 19.75,34.53 | 19.75,34.53 v19.56,34.52 | ESPWROOM.IO25 19.77,34.52 19.75,34.53
  Top 0.203: 20.87,34.61 18.89,34.61 17.94,33.66 17.94,26.19 IO25.1 13.34,21.59 3.17,21.59 E$1.8
IO26  (via drill 0.35)
  Top 0.152: ESPWROOM.IO26 v19.56,33.25
  Top 0.203: IO26.1 13.34,19.05 3.17,19.05 E$1.9
  Bottom 0.203: IO26.1 15.88,20.32 16.03,20.48 16.03,23.81 17.94,25.72 17.94,32.54 18.64,33.25 v19.56,33.25
IO27  (via drill 0.35)
  Top 0.152: IO27.1 14.76,17.94 15.88,17.94 16.02,18.09 16.02,23.32 18.41,25.72 18.41,31.43 18.96,31.98 19.37,31.98 | 19.37,31.98 v19.56,31.98 | ESPWROOM.IO27 19.37,31.98
  Top 0.203: IO27.1 13.34,16.51 3.17,16.51 E$1.10
IO32  (via drill 0.35)
  Top 0.152: v19.56,37.06 ESPWROOM.IO32
  Top 0.203: IO32.1 13.34,26.67 3.17,26.67 E$1.6
  Bottom 0.203: IO32.1 17.42,30.76 17.42,36.32 18.17,37.06 v19.56,37.06
IO33  (via drill 0.35)
  Top 0.152: 18.81,35.8 19.44,35.79 | 19.44,35.79 v19.56,35.79 | ESPWROOM.IO33 19.44,35.79
  Top 0.203: 18.81,35.8 17.3,34.29 17.3,26.67 16.03,25.4 IO33.1 13.34,24.13 3.17,24.13 E$1.7
IO34  (via drill 0.35)
  Top 0.203: IO34.1 13.34,31.75 3.17,31.75 E$1.4 | ESPWROOM.IO34 v19.56,39.6
  Bottom 0.203: IO34.1 16.66,35.07 16.66,37.77 18.49,39.6 18.98,39.6 v19.56,39.6
IO35  (via drill 0.35)
  Top 0.152: IO35.1 | v19.56,38.33 19.37,38.33 ESPWROOM.IO35
  Top 0.203: IO35.1 13.34,29.21 3.17,29.21 E$1.5 | 19.37,38.33 18.33,38.33 16.67,36.67 16.67,32.55 IO35.1
RX  (via drill 0.35)
  Top 0.152: RX.1 43.5,34.61 43.5,36.35 42.39,37.47 42.39,39.21 40.73,40.87 ESPWROOM.RX v40.39,40.87
  Top 0.203: RX.1 46.36,31.75 56.52,31.75 E$16.12
S$1
  Bottom 0.152: 20.95,16.51 26.04,16.51
S$2
  Bottom 0.152: 20.95,11.43 26.04,11.43
S$3
  Bottom 0.152: 33.66,11.43 38.73,11.43
S$4
  Bottom 0.152: 19.68,22.86 20.95,21.59 38.42,21.59 38.73,21.59 40.01,22.86
S$7
  Bottom 0.152: 33.66,16.51 38.73,16.51
S$8
  Bottom 0.152: 14.61,2.54 16.51,0.64 43.18,0.64 45.09,2.54
S$9
  Top 0.152: 9.53,2.54 11.43,0.64 48.26,0.64 50.16,2.54
S$12
  Bottom 0.152: 34.93,15.24 33.66,13.97 26.04,13.97 24.76,15.24
S$13
  Bottom 0.152: 34.93,10.16 33.66,8.89 26.04,8.89 24.76,10.16
S$43  (via drill 0.35)
  other vias: 40.39,38.33
SD0  (via drill 0.35)
  Top 0.152: ESPWROOM.SD0 31.86,26.36 31.85,26.35
  Top 0.203: SD0.1 31.86,23.39 31.85,26.35 v31.85,26.52
SD1  (via drill 0.35)
  Top 0.152: ESPWROOM.SD1 33.13,26.2 33.12,26.19
  Top 0.203: SD1.1 33.13,24.66 33.12,26.19 v33.12,26.52
SD2  (via drill 0.35)
  Top 0.152: ESPWROOM.SD2 26.78,26.2 26.78,26.19
  Top 0.203: 23.02,23.65 SD2.1 23.81,24.45 25.4,24.45 26.78,25.83 26.78,26.19 v26.77,26.52
SD3  (via drill 0.35)
  Top 0.152: ESPWROOM.SD3 v28.05,26.53 v28.04,26.52
  Top 0.203: SD3.1 28.05,26.14 v28.04,26.52
SENSOR_VN  (via drill 0.35)
  Top 0.152: v19.56,40.87 19.37,40.87 ESPWROOM.SENSOR_VN
  Top 0.203: 19.37,40.87 18.96,40.87 16.19,38.1 16.19,37.15 SENS_VN.1 13.34,34.29 3.17,34.29 E$1.3
SENSOR_VP  (via drill 0.35)
  Top 0.152: ESPWROOM.SENSOR_VP 19.86,42.14
  Top 0.203: ESPWROOM.SENSOR_VP v19.56,42.14 19.12,42.14 19.11,42.14 16.01,39.04 15.54,39.04 SENS_VP.1 13.34,36.83 3.17,36.83 E$1.2
TX  (via drill 0.35)
  Top 0.152: TX.1 45.09,35.72 43.5,37.31 43.5,38.89 40.8,41.59 40.8,42.07 40.73,42.14 v40.39,42.14 ESPWROOM.TX
  Top 0.203: TX.1 46.36,34.29 56.52,34.29 E$16.13
VIN
  Top 0.813: E$1.15 E$38.V+ E$37.V+ E$34.V+ E$35.V+ E$36.V+ 15.24,4.45 17.14,4.45 20.16,4.45 22.45,2.15 AMS111733.3
(copper drawn outside any net)
  shapes: Bottom circle x171

## Text on the board
tNames: Greg Ware | Greg Ware | GND | GND | 3V3 | GND | 3V3 | GND | 3V3 | GND | GND | 3V3 | GND | 3V3 | GND | 3V3 | GND | EN | D23 | VP | D22 | VN | TX0 | D34 | RX0 | D35 | D21 | D32 | D19 | D33 | D18 | D25 | D5 | D26 | TX2 | D27 | RX2 | D14 | D4 | D12 | D2 | D13 | D15 | GND | GND | GND | GND | GND | GND | GND | GND | GND | GND | GND | GND | GND | GND | VIN | VIN | VIN | VIN | VIN | 3V3 | 3V3 | 3V3 | 3V3 | 3V3 | Greg Ware | 3V3 | Greg Ware
bNames: Greg Ware | GND | 3V3 | GND | 3V3 | GND | 3V3 | GND | GND | 3V3 | GND | 3V3 | GND | 3V3 | GND | EN | IO23 | EN | D23 | VP | IO22 | VP | D22 | VN | VN | TX0 | TX0 | IO34 | RX0 | D34 | RX0 | D35 | IO35 | IO21 | D21 | IO32 | IO19 | D32 | D19 | IO33 | IO18 | D33 | SD2 | SD3 | CMD | CLK | SD0 | SD1 | IO0 | D18 | IO25 | IO5 | D25 | D5 | IO26 | TX2 | D26 | TX2 | IO27 | RX2 | D27 | RX2 | IO14 | IO4 | D14 | D4 | IO12 | IO2 | D12 | D2 | IO13 | IO15 | D13 | D15 | GND | GND | GND | GND | VIN | VIN | 3V3 | 3V3